# EAGLE board VIVA_PIC16_1591A-REV3.2 (EAGLE 6.3)
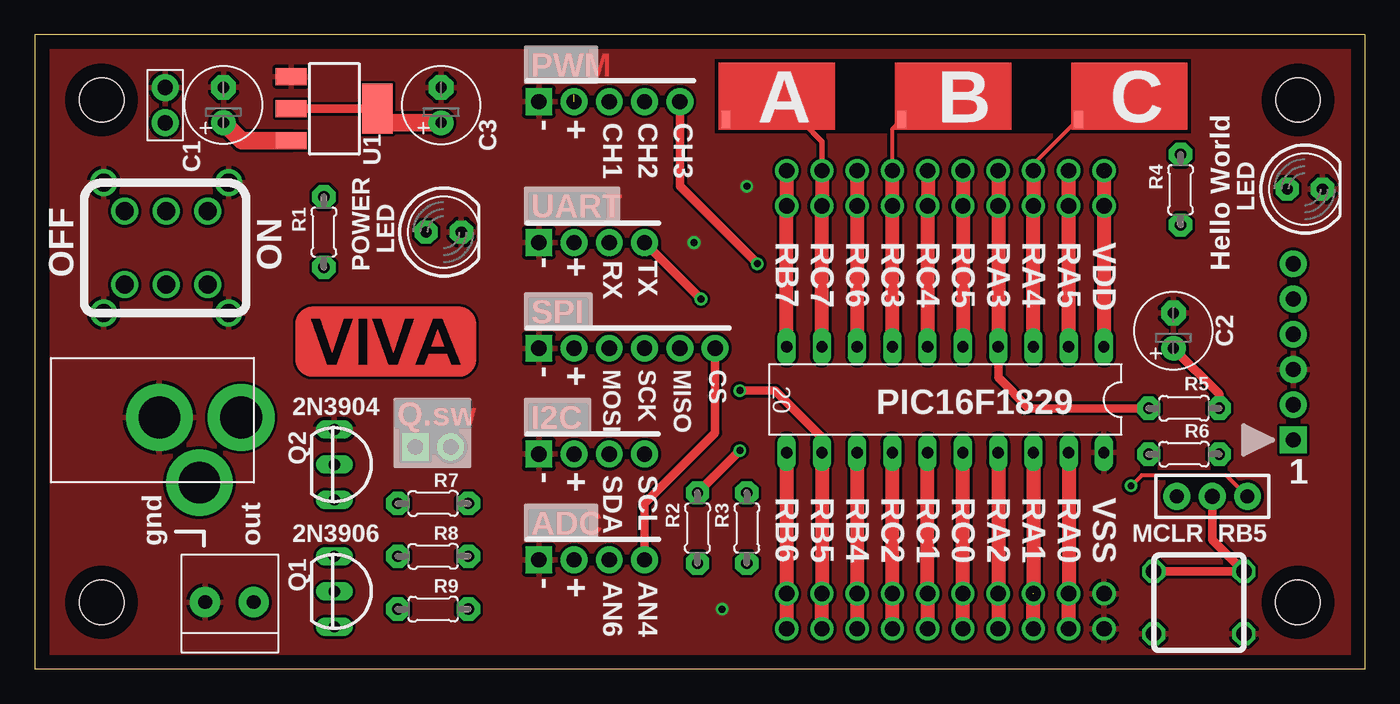
[diagram p0: board, top side]
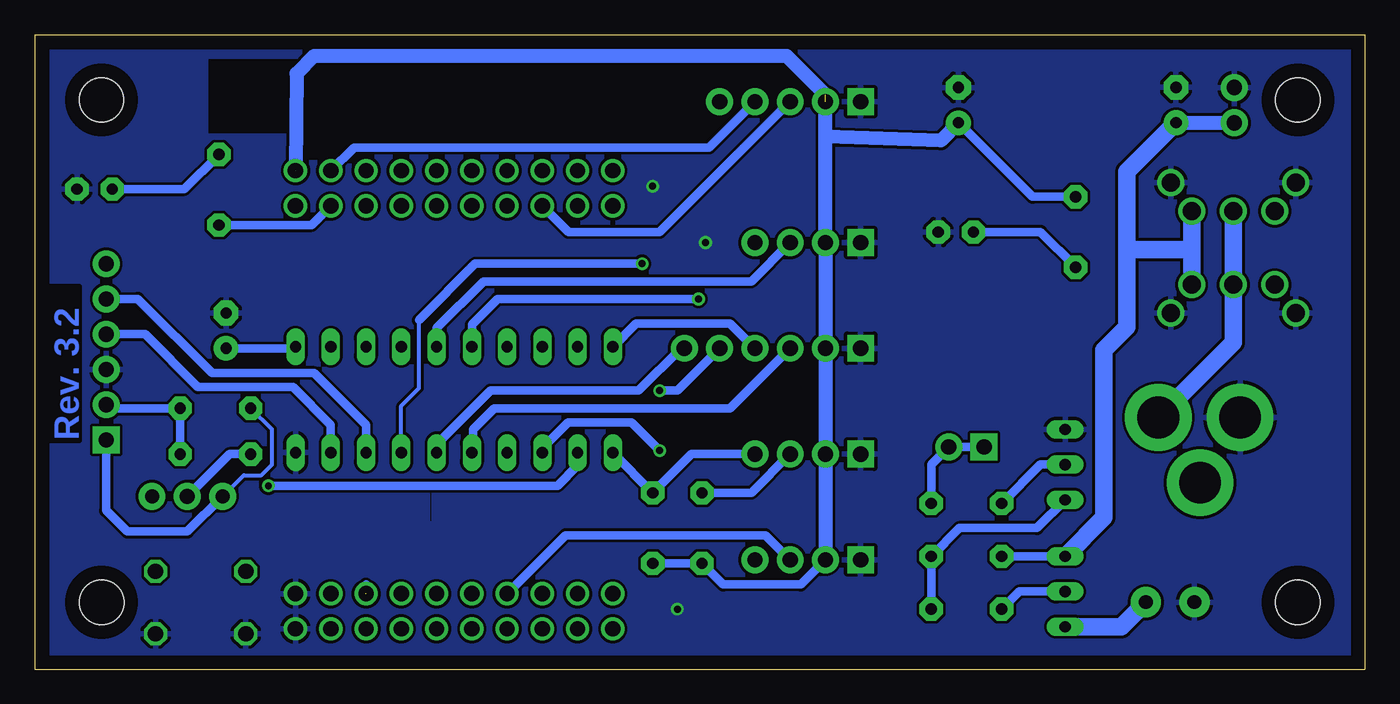
[diagram p1: board, bottom side, seen from below]

Size 95.83 x 45.72 mm. Coordinates in mm from the lower left corner, seen from the top.
Outline: 95.83,45.72 95.83,0 0,0 0,45.72 95.83,45.72
Copper layers (1*16): Top 0.035mm / dielectric 1.5mm / Bottom 0.035mm
Design rules "default *": minimum track width 10mil, minimum drill 24mil, track to track 8mil, track to pad 8mil, pad to pad 8mil, via to via 8mil, smd to smd 8mil, copper to edge 40mil, drill to drill 8mil, minimum pad ring 10mil, minimum via ring 8mil, stop-mask expansion 4mil, vias tented up to drill 20mil, thermal gap 10mil
Holes 3.2 mm at 4.82,41.01 4.82,4.81 91.01,4.81 91.02,41.01
tRestrict: 1 lines
bRestrict: 3 lines

## Footprints (pad centres in the part's own frame; a part is rotated, then mirrored left to right if it is on the bottom)
E2,5-6 = drill 0.813 pad 1.778: + -1.27,0 | drill 0.813 pad 1.778 octagon: - 1.27,0
1X2-3.5MM = drill 1 pad 2.184: 1 1.8,0; 2 -1.7,0
LED5MM = drill 0.813 pad 1.676 octagon: A -1.27,0; K 1.27,0
DIL20 = drill 0.813 long: 1 0,0; 2 2.54,0; 3 5.08,0; 4 7.62,0; 5 10.16,0; 6 12.7,0; 7 15.24,0; 8 17.78,0; 9 20.32,0; 10 22.86,0; 11 22.86,7.62; 12 20.32,7.62; 13 17.78,7.62; 14 15.24,7.62; 15 12.7,7.62; 16 10.16,7.62; 17 7.62,7.62; 18 5.08,7.62; 19 2.54,7.62; 20 0,7.62
TO92-EBC-OVAL = drill 0.813 long: B 0,-1.27; C 2.54,-1.27; E -2.54,-1.27
0204/5 = drill 0.813 pad 1.676 octagon: 1 -2.54,0; 2 2.54,0
SOT223 = smd 1.219 x 2.235: 1 -2.311,-3.099; 2 0,-3.099; 3 2.311,-3.099 | smd 3.6 x 2.2: 4 0,3.099
PJ-102A = drill 3 pad 4.8: RING 0.1,-3.39; RING_SW -4.6,-6.29; TIP 0.1,-9.29
OS202013MT5QN1 = drill 1.3: 1 1.499,7.353; 2 4.496,7.353; 3 7.493,7.353; 4 1.499,2.045; 5 4.496,2.045; 6 7.493,2.045; GND1 0,9.398; GND2 8.992,9.398; GND3 0,0; GND4 8.992,0
PUSHBUTTON_1301_9303 = drill 1.1 octagon: 1 0,0; 2 0,6.5; 3 4.5,0; 4 4.5,6.5
PINS_5 = drill 1.1 pad 1.93 square: 1 0,0 | drill 1.1 pad 1.93: 2 2.54,0; 3 5.08,0; 4 7.62,0; 5 10.16,0
PINS_4 = drill 1.1 pad 1.93 square: 1 0,0 | drill 1.1 pad 1.93: 2 2.54,0; 3 5.08,0; 4 7.62,0
PINS_6 = drill 1.1 pad 1.93 square: 1 0,0 | drill 1.1 pad 1.93: 2 2.54,0; 3 5.08,0; 4 7.62,0; 5 10.16,0; 6 12.7,0
PINS_2 = drill 1.1 pad 1.93 square: 1 0,0 | drill 1.1 pad 1.93: 2 2.54,0
PICKIT3 = drill 1.1 pad 1.93 square: 1 0,0 | drill 1.1 pad 1.93: 2 2.54,0; 3 5.08,0; 4 7.62,0; 5 10.16,0; 6 12.7,0
VIVA_PIC16 = drill 1.1 pad 1.676: 1.L -2.54,0; 1.R 0,0; 2.L -2.54,-2.54; 2.R 0,-2.54; 3.L -2.54,-5.08; 3.R 0,-5.08; 4.L -2.54,-7.62; 4.R 0,-7.62; 5.L -2.54,-10.16; 5.R 0,-10.16; 6.L -2.54,-12.7; 6.R 0,-12.7; 7.L -2.54,-15.24; 7.R 0,-15.24; 8.L -2.54,-17.78; 8.R 0,-17.78; 9.L -2.54,-20.32; 9.R 0,-20.32; 10.L -2.54,-22.86; 10.R 0,-22.86; 11.L 27.94,-22.86; 11.R 30.48,-22.86; 12.L 27.94,-20.32; 12.R 30.48,-20.32; 13.L 27.94,-17.78; 13.R 30.48,-17.78; 14.L 27.94,-15.24; 14.R 30.48,-15.24; 15.L 27.94,-12.7; 15.R 30.48,-12.7; 16.L 27.94,-10.16; 16.R 30.48,-10.16; 17.L 27.94,-7.62; 17.R 30.48,-7.62; 18.L 27.94,-5.08; 18.R 30.48,-5.08; 19.L 27.94,-2.54; 19.R 30.48,-2.54; 20.L 27.94,0; 20.R 30.48,0
CAP_TOUCH_BUTTON = smd 0.635 x 1.27: A 0.762,0.762; B 13.462,0.762; C 26.162,0.762
PIN_3 = drill 1 pad 1.93: P1 0,0; P3 5.08,0 | drill 1.1 pad 1.93: P2 2.54,0
PIN_2 = drill 1.1 pad 1.93: P$1 0,0; P$2 2.54,0

## Placement (x,y rotation side)
C1  [E2,5-6]  13.6,40.65 90 top
C2  [E2,5-6]  82.04,24.38 90 top
C3  [E2,5-6]  29.28,40.64 90 top
J1  1X2-3.5MM  [1X2-3.5MM]  13.97,4.83 0 top
LED1  [LED5MM]  29.46,31.5 0 top
LED2  [LED5MM]  91.51,34.59 0 top
PIC16F1823  PIC16F1829  [DIL20]  77.03,23.22 180 top
Q1  2N3906  [TO92-EBC-OVAL]  22.86,5.59 270 top
Q2  2N3904  [TO92-EBC-OVAL]  22.86,14.73 270 top
R1  [0204/5]  20.83,31.5 270 top
R2  [0204/5]  47.75,10.16 90 top
R3  [0204/5]  51.31,10.16 90 top
R4  [0204/5]  82.55,34.54 270 top
R5  [0204/5]  82.8,18.8 0 top
R6  [0204/5]  82.8,15.49 0 top
R7  10k  [0204/5]  28.7,11.94 0 top
R8  100k  [0204/5]  28.7,8.13 0 top
R9  10k  [0204/5]  28.7,4.32 180 top
U1  REGULATOR_SCHSOT223  [SOT223]  21.59,40.39 270 top
U$1  2.1MMJACKTHM  [PJ-102A]  5.59,18.03 90 top
U$2  [VIVA_LOGO]  18.8,21.08 0 top
U$3  SWITCH_OS202013  [OS202013MT5QN1]  13.97,35.05 180 top
U$4  [PUSHBUTTON_1301_9303]  87.12,2.54 90 top
U$5  PINS_5  [PINS_5]  36.32,40.89 0 top
U$6  PINS_4  [PINS_4]  36.32,30.73 0 top
U$7  PINS_4  [PINS_4]  36.32,15.49 0 top
U$8  PINS_4  [PINS_4]  36.32,7.87 0 top
U$9  PINS_6  [PINS_6]  36.32,23.11 0 top
U$10  PINS_2  [PINS_2]  27.43,16 0 top
U$11  PICKIT3  [PICKIT3]  90.68,16.51 90 top
U$12  VIVA_PIC16  [VIVA_PIC16]  77.04,33.38 270 top
U$13  CAP_BUTTON_3  [CAP_TOUCH_BUTTON]  49.02,38.86 0 top
U$14  PINS_3  [PIN_3]  82.3,12.45 0 top
U$15  PINS_2  [PIN_2]  9.4,39.37 90 top

## Library data of the parts
C1-C3 = mini-nolan-ada
J1 LED1 LED2 R1-R9 U$1 = adafruit
PIC16F1823 = microchip
Q1 Q2 U$10 = nolan-classic-kits
U1 U$2-U$9 U$11 U$12 = nolan-viva
U$13-U$15 = viva

## Nets
AUX: U$11.6
BAT: U$1.TIP U$3.2 U$3.5
BUT: R6.1 U$4.3 U$4.4 U$14.P2
CAP_A: PIC16F1823.9 U$12.9.L U$12.9.R U$13.A
CAP_B: PIC16F1823.7 U$12.7.L U$12.7.R U$13.B
CAP_C: PIC16F1823.3 U$12.3.L U$12.3.R U$13.C
CH1: PIC16F1823.8 U$5.3 U$12.8.L U$12.8.R
CH2: PIC16F1823.2 R4.2 U$5.4 U$12.2.L U$12.2.R
CH3: PIC16F1823.17 U$5.5 U$12.17.L U$12.17.R
CHA: PIC16F1823.14 U$8.3 U$12.14.L U$12.14.R
CS: PIC16F1823.16 U$8.4 U$9.6 U$12.16.L U$12.16.R
GND: C1.- C2.- C3.- J1.2 LED1.K LED2.K PIC16F1823.20 Q2.E U1.1 U$1.RING U$3.GND1 U$3.GND2 U$3.GND3 U$3.GND4 U$4.1 U$4.2 U$5.1 U$6.1 U$7.1 U$8.1 U$9.1 U$11.3 U$12.20.L U$12.20.R U$15.P$2
ICSP_CLK: PIC16F1823.18 U$11.5 U$12.18.L U$12.18.R
ICSP_DAT: PIC16F1823.19 U$11.4 U$12.19.L U$12.19.R
MCLR: PIC16F1823.4 R5.1 U$11.1 U$12.4.L U$12.4.R U$14.P1
MISO: PIC16F1823.12 U$9.5 U$12.12.L U$12.12.R U$14.P3
MOSI: PIC16F1823.15 U$9.3 U$12.15.L U$12.15.R
N$10: Q2.B R7.1
N$11: Q2.C R8.2 R9.1
N$14: Q1.B R9.2
N$19: R7.2 U$10.1 U$10.2
N$21: LED1.A R1.2
N$23: LED2.A R4.1
OUT: J1.1 Q1.C
RB4: U$12.13.L U$12.13.R
RB6: U$12.11.L U$12.11.R
RC4: PIC16F1823.6 U$6.4 U$12.6.L U$12.6.R
RC5: PIC16F1823.5 U$6.3 U$12.5.L U$12.5.R
SCK: PIC16F1823.10 U$9.4 U$12.10.L U$12.10.R
SCL: PIC16F1823.11 R3.2 U$7.4
SDA: PIC16F1823.13 R2.2 U$7.3
VDD: C2.+ C3.+ PIC16F1823.1 R1.1 R2.1 R3.1 R5.2 R6.2 U1.2 U1.4 U$5.2 U$6.2 U$7.2 U$8.2 U$9.2 U$11.2 U$12.1.L U$12.1.R
VIN: C1.+ Q1.E R8.1 U1.3 U$3.1 U$3.4 U$15.P$1

## Tracks (layer width: path | path; a pad name or v marks a point on that pad's centre or on a via)
BAT
  Bottom 1.27: U$1.TIP 9.47,23.54 U$3.2 U$3.5
BUT
  Top 0.61: U$14.P2 84.84,9.33 U$4.3 U$4.4
  Bottom 0.61: R6.1 81.79,15.49 U$14.P2
CAP_A
  Top 0.406: U$12.9.L 56.72,38.02 55.37,39.37 U$13.A
  Top 1.016: U$12.9.L U$12.9.R | U$12.9.R | PIC16F1823.9 U$12.9.R
CAP_B
  Top 0.305: U$12.7.L 61.8,38.94 U$13.B
  Top 1.016: PIC16F1823.7 U$12.7.R U$12.7.L
CAP_C
  Top 0.305: U$12.3.L 71.96,36.4 U$13.C
  Top 1.016: U$12.3.L U$12.3.R | U$12.3.R | PIC16F1823.3 U$12.3.R
CH1
  Top 1.016: U$12.8.L U$12.8.R PIC16F1823.8
  Bottom 0.61: U$12.8.R 57.38,31.5 50.8,31.5 U$5.3
CH2
  Top 1.016: PIC16F1823.2 U$12.2.R U$12.2.L
  Bottom 0.61: U$12.2.L 72.82,37.59 47.24,37.59 U$5.4 | R4.2 75.87,32 U$12.2.R
CH3  (via drill 0.5)
  Top 0.61: U$5.5 46.48,34.8 v52.07,29.21
  Top 1.016: PIC16F1823.17 U$12.17.L U$12.17.R
  Bottom 0.305: PIC16F1823.17 69.41,18.98 68.15,20.24 68.15,25.15
  Bottom 0.61: 68.15,25.15 64.08,29.21 v52.07,29.21
CHA
  Top 1.016: U$12.14.R U$12.14.L PIC16F1823.14
  Bottom 0.61: U$8.3 43.18,9.65 57.58,9.65 U$12.14.L
CS
  Top 0.61: U$8.4 43.94,11.94 49.02,17.02 U$9.6
  Top 1.016: U$12.16.R U$12.16.L PIC16F1823.16
  Bottom 0.61: PIC16F1823.16 66.87,16.18 62.99,20.07 52.32,20.07 49.28,23.11 U$9.6
GND  (via drill 0.5)
  other vias: 49.53,4.32 47.5,30.73 51.31,34.8
  pour Top: 0.81,0.81 0.81,44.7 95.1,44.7 95.1,0.81
  pour Bottom: 0.81,0.81 0.81,44.7 95.1,44.7 95.1,0.81
ICSP_CLK  (1 unrouted)
  Top 1.016: PIC16F1823.18 U$12.18.L U$12.18.R
  Bottom 0.61: 71.95,15.39 PIC16F1823.18 71.95,17.6 75.69,21.34 83.06,21.34 88.39,26.67 U$11.5 | U$12.18.L 71.95,6.1
ICSP_DAT
  Top 1.016: U$12.19.R U$12.19.L PIC16F1823.19
  Bottom 0.61: U$11.4 87.88,24.13 84.07,20.32 77.22,20.32 74.49,17.6 PIC16F1823.19
MCLR
  Top 0.61: R5.1 71.63,18.8 69.41,21.01 PIC16F1823.4
  Top 1.016: U$12.4.L U$12.4.R PIC16F1823.4
  Bottom 0.305: U$14.P1 80.77,13.97 79.5,13.97 78.74,14.73 78.74,17.27 R5.1
  Bottom 0.61: U$11.1 90.68,11.43 89.15,9.91 84.84,9.91 U$14.P1
MISO  (via drill 0.5)
  Top 0.305: U$14.P3 85.85,13.97 79.76,13.97 v78.99,13.21
  Top 0.61: v50.8,20.07 53.34,20.07 56.64,16.76 56.64,15.68 PIC16F1823.12
  Top 1.016: U$12.12.R U$12.12.L | U$12.12.L | PIC16F1823.12 U$12.12.L
  Bottom 0.61: PIC16F1823.12 56.71,14.66 58.17,13.21 v78.99,13.21 | U$9.5 49.53,20.07 v50.8,20.07
MOSI
  Top 1.016: U$12.15.R U$12.15.L PIC16F1823.15
  Bottom 0.61: PIC16F1823.15 64.26,15.68 64.26,17.27 62.74,18.8 45.72,18.8 U$9.3
N$10
  Bottom 0.61: Q2.B 23.37,14.73 R7.1
N$11
  Bottom 0.61: R9.1 R8.2 29.21,10.16 23.62,10.16 Q2.C
N$14
  Bottom 0.61: Q1.B 24.89,5.59 R9.2
N$19
  Bottom 0.61: U$10.1 U$10.2 31.24,14.73 R7.2
N$21
  Bottom 0.61: R1.2 23.37,31.5 LED1.A
N$23
  Bottom 0.61: LED2.A 85.04,34.59 R4.1
OUT
  Bottom 1.27: Q1.C 17.55,3.05 J1.1
RB4
  Top 1.016: 59.26,15.6 U$12.13.L U$12.13.R
RB6
  Top 1.016: 54.18,15.6 U$12.11.L U$12.11.R
RC4  (via drill 0.5)
  Top 0.61: U$6.4 v48.01,26.67
  Top 1.016: U$12.6.L U$12.6.R PIC16F1823.6
  Bottom 0.61: PIC16F1823.6 64.33,24.82 62.48,26.67 v48.01,26.67
RC5
  Top 1.016: U$12.5.L U$12.5.R PIC16F1823.5
  Bottom 0.61: PIC16F1823.5 66.87,24.57 63.5,27.94 44.2,27.94 U$6.3
SCK
  Top 1.016: U$12.10.L U$12.10.R | U$12.10.R | PIC16F1823.10 U$12.10.R
  Bottom 0.61: U$9.4 45.72,24.89 52.51,24.89 PIC16F1823.10
SCL
  Bottom 0.61: U$7.4 48.51,15.49 R3.2 54.17,15.57 PIC16F1823.11
SDA  (via drill 0.5)
  Top 0.61: R2.2 v50.8,15.75
  Bottom 0.61: U$7.3 44.2,12.7 R2.2 | v50.8,15.75 52.83,17.78 57.4,17.78 59.25,15.93 PIC16F1823.13
VDD  (2 unrouted)
  Top 0.61: U1.2 U1.4 | C2.+ 85.34,19.81 R5.2
  Top 1.016: U$12.1.L U$12.1.R PIC16F1823.1
  Top 1.27: U1.4 24.69,39.37 C3.+
  Bottom 0.61: C2.+ 77.14,23.11 PIC16F1823.1 | R1.1 23.95,34.04 C3.+ | U$11.2 90.42,18.8 R5.2 R6.2 | U$8.2 40.64,6.1 46.23,6.1 R2.1 R3.1
  Bottom 1.016: U$12.1.L 77.03,36 76.96,42.93 75.69,44.2 41.66,44.2 38.86,41.4 | C3.+ 30.55,38.1 38.86,38.35 | 38.86,38.35 U$6.2 U$9.2 U$7.2 U$8.2 | 38.86,38.35 U$5.2
VIN
  Top 1.27: U1.3 14.91,38.08 C1.+
  Bottom 0.61: Q1.E R8.1
  Bottom 1.016: C1.+ 9.41,39.38 U$15.P$1
  Bottom 1.27: 17.14,30.23 17.14,24.64 18.8,22.99 18.8,10.92 Q1.E | 17.14,30.23 12.47,30.23 | C1.+ 17.14,35.84 17.14,30.23 | U$3.4 12.47,30.23 | U$3.1 12.47,30.23

## Text on the board
Top: PWM | UART | SPI | Q.sw | I2C | ADC
Bottom: Rev. 3.2
tPlace: - | + | CH1 | CH2 | CH3 | LED | RB7 | RC7 | RC6 | RC3 | RC4 | RC5 | RA3 | RA4 | RA5 | VDD | LED | - | + | ON | POWER | RX | TX | Hello World | OFF | - | + | MOSI | SCK | MISO | CS | 20 | PIC16F1829 | 1 | - | + | SDA | SCL | RB6 | RB5 | RB4 | RC2 | RC1 | RC0 | RA2 | RA1 | RA0 | VSS | gnd | out | MCLR RB5 | - | + | AN6 | AN4
tStop: PWM | UART | SPI | Q.sw | I2C | ADC
bStop: Rev. 3.2